# EAGLE board 3886-main (EAGLE 9.2.2)

Size 117.27 x 93.22 mm. Coordinates in mm from the lower left corner, seen from the top.
Outline: 117.27,93.22 0.14,93.11 0,0 117.13,0.11 117.27,93.22
Copper layers (1*16): Top 0.035mm / dielectric 1.5mm / Bottom 0.035mm
Design rules "default": minimum track width 6mil, minimum drill 0.35mm, track to track 6mil, track to pad 6mil, pad to pad 6mil, via to via 6mil, smd to smd 6mil, copper to edge 40mil, drill to drill 6mil, minimum pad ring 10mil, minimum via ring 8mil, stop-mask expansion 4mil, vias tented up to drill 0mil, thermal gap 10mil

## Footprints (pad centres in the part's own frame; a part is rotated, then mirrored left to right if it is on the bottom)
GBJ = drill 1.676 pad 3.81 octagon: + -12.4,0; - 12.4,0; AC1 -2.6,0; AC2 4.9,0
WCAP-ATG5_18X35.5(DXL) = drill 1.1: 1 3.75,0; 2 -3.75,0
CERAMIC-2.54 = drill 0.635 pad 1.143: 1 -1.27,0; 2 1.27,0
TERMINALBLOCK_PLUGGABLE-3-7.62MM = drill 1.6 pad 3.81 square: 1 -7.62,0 | drill 1.6 pad 3.81: 2 0,0; 3 7.62,0
TO220-11 = drill 1.016 pad 1.778 long: 1 -8.89,-2.54; 2 -7.112,2.54; 3 -5.334,-2.54; 4 -3.556,2.54; 5 -1.778,-2.54; 6 0,2.54; 7 1.778,-2.54; 8 3.556,2.54; 9 5.334,-2.54; 10 7.112,2.54
3RP/1610G = drill 1.2 pad 2.184: 1-1 -5,0; 1-2 0,0; 1-3 5,0; 2-1 -5,5; 2-2 0,5; 2-3 5,5

## Placement (x,y rotation side)
B1  GBJ25  [GBJ]  17.78,76.71 270 top
C1  3300 µF  [WCAP-ATG5_18X35.5(DXL)]  92.96,63 90 top
C2  3300 µF  [WCAP-ATG5_18X35.5(DXL)]  72.64,63 90 top
C3  3300 µF  [WCAP-ATG5_18X35.5(DXL)]  52.32,63 90 top
C4  3300 µF  [WCAP-ATG5_18X35.5(DXL)]  32,63 90 top
C5  3300 µF  [WCAP-ATG5_18X35.5(DXL)]  92.96,83.32 90 top
C6  3300 µF  [WCAP-ATG5_18X35.5(DXL)]  72.64,83.32 90 top
C7  3300 µF  [WCAP-ATG5_18X35.5(DXL)]  52.32,83.32 90 top
C8  3300 µF  [WCAP-ATG5_18X35.5(DXL)]  32,83.32 90 top
C9  100nf  [CERAMIC-2.54]  101.6,72.65 0 top
C10  100nf  [CERAMIC-2.54]  106.17,60.96 0 top
FRAME1  FRAME-LEDGER  [CREATIVE_COMMONS]  -141.73,-34.54 0 top  (outside the outline)
J1  audio_output  [TERMINALBLOCK_PLUGGABLE-3-7.62MM]  6.1,80.27 270 top
J6  audio_output  [TERMINALBLOCK_PLUGGABLE-3-7.62MM]  109.13,78.44 90 top
U$1  [TO220-11]  28.45,41.15 0 top
U$2  [TO220-11]  27.43,18.8 0 top
W01  [3RP/1610G]  92.23,3.66 0 top
W02  [3RP/1610G]  57.19,3.67 0 top

## Library data of the parts
B1 = rectifier
C1-C8 = Wurth_Capacitors_WCAP-ATG5; DATASHEET-URL: https://www.we-online.com/catalog/datasheet/860020681032.pdf; DF: 10%; DIAMETER: 18mm; I-LEAK: 1650uA; I-RIPPLE: 1750mA; L: 35.5mm; OPERATING-TEMPERATURE: -25 °C up to +105 °C; PART-NUMBER: 860020681032; PITCH: 7.5mm; TECHNICAL-REFERENCE: ATDL355332M050DSPAEB000; VR: 50V(DC)
C9 C10 = OPL_Capacitor; MPN: CC1-F5SL2A101KSPW
FRAME1 = SparkFun-Aesthetics
J1 J6 = Terminal Blocks; CREATED_BY: PCBLayout.com; DIGIKEY_PART_NO: 732-2824-ND; MANUFACTURER: WURTH ELEKTRONIK; MPN: 691311400103
U$1 U$2 = LM3886
W01 W02 = pot

## Nets
1: U$1.1 U$2.1
4: U$1.4 U$2.4
5: U$1.5 U$2.5
7: U$1.7 U$2.7
N$1: B1.AC2 J1.3
N$2: B1.AC1 J1.1
N$4: C1.2 C2.2 C3.2 C4.2 C5.1 C6.1 C7.1 C8.1 C9.1 C10.2 J1.2
N$5: B1.+ C1.1 C2.1 C3.1 C4.1 C9.2
N$6: B1.- C5.2 C6.2 C7.2 C8.2 C10.1

## Tracks (layer width: path | path; a pad name or v marks a point on that pad's centre or on a via)
1  (1 unrouted)
4  (1 unrouted)
5  (1 unrouted)
7  (1 unrouted)
N$1  (1 unrouted)
N$2  (1 unrouted)
N$4  (10 unrouted)
N$5  (5 unrouted)
N$6  (5 unrouted)